# Altium PCB LED_Controller.PcbDoc
Units mm, origin at the board's own origin, x right, y up, seen from the top; angles counter-clockwise.
Board outline 60 x 100 mm, 2 copper layers (Top Layer, Bottom Layer); 26 components, 28 nets, 119 pads, 71 vias.
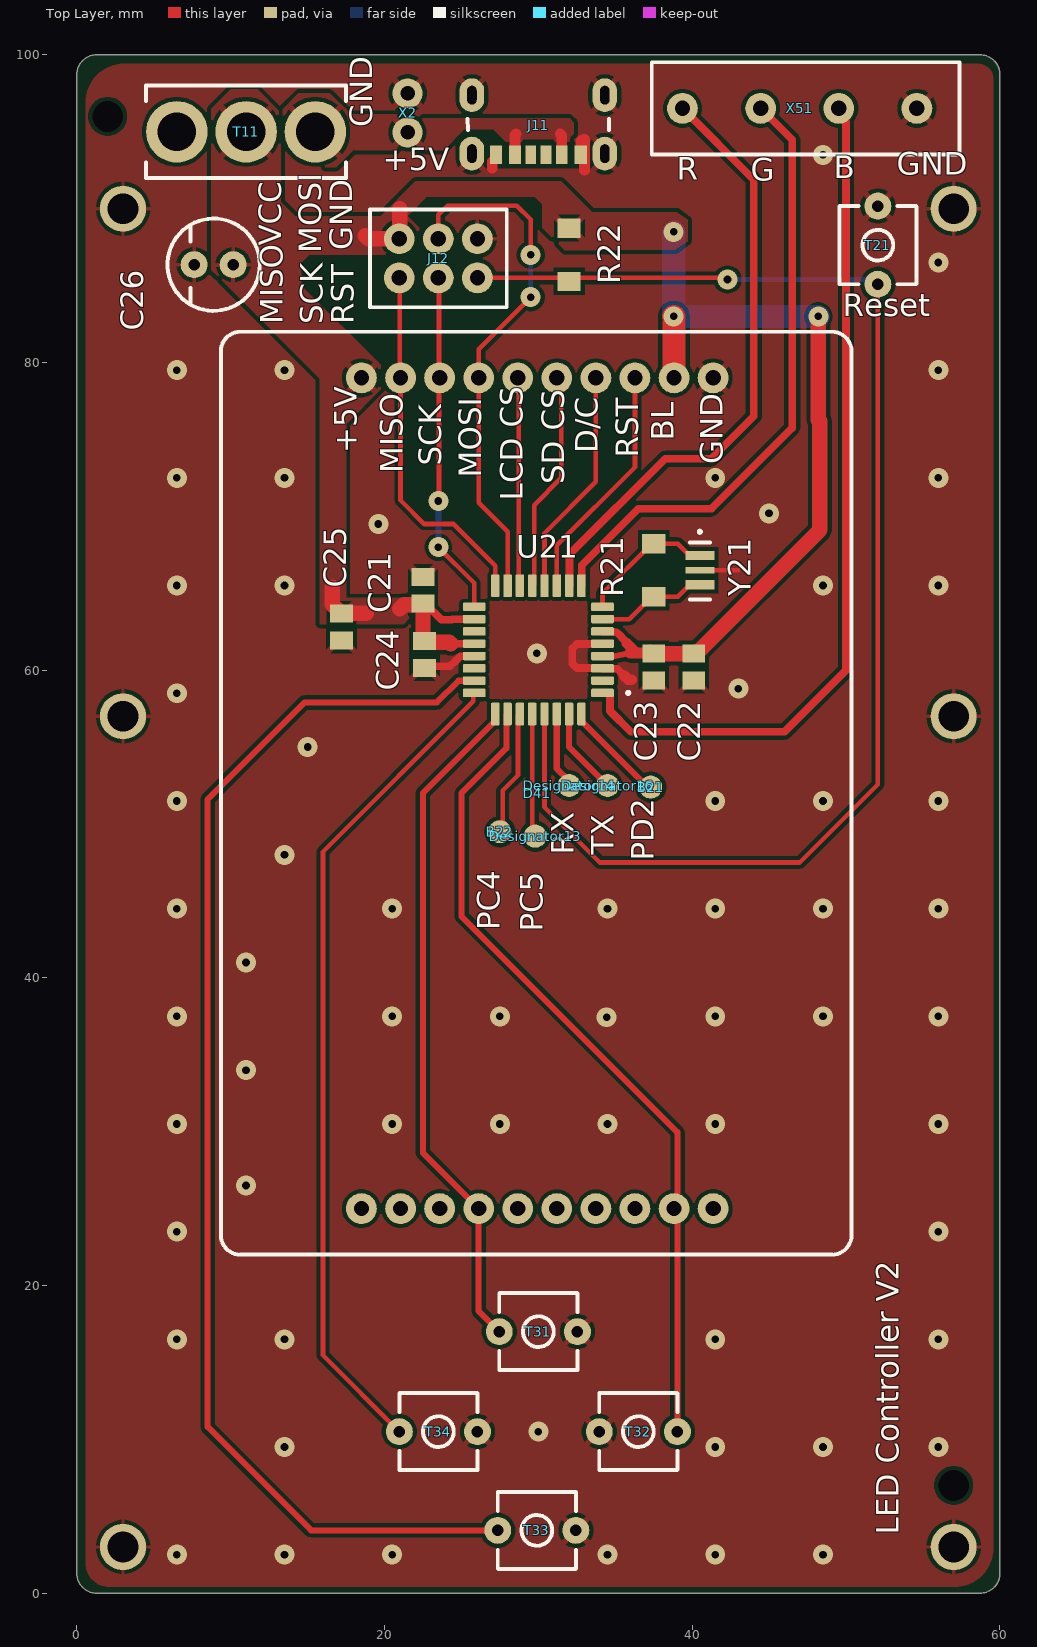
[diagram p0: Top Layer view]
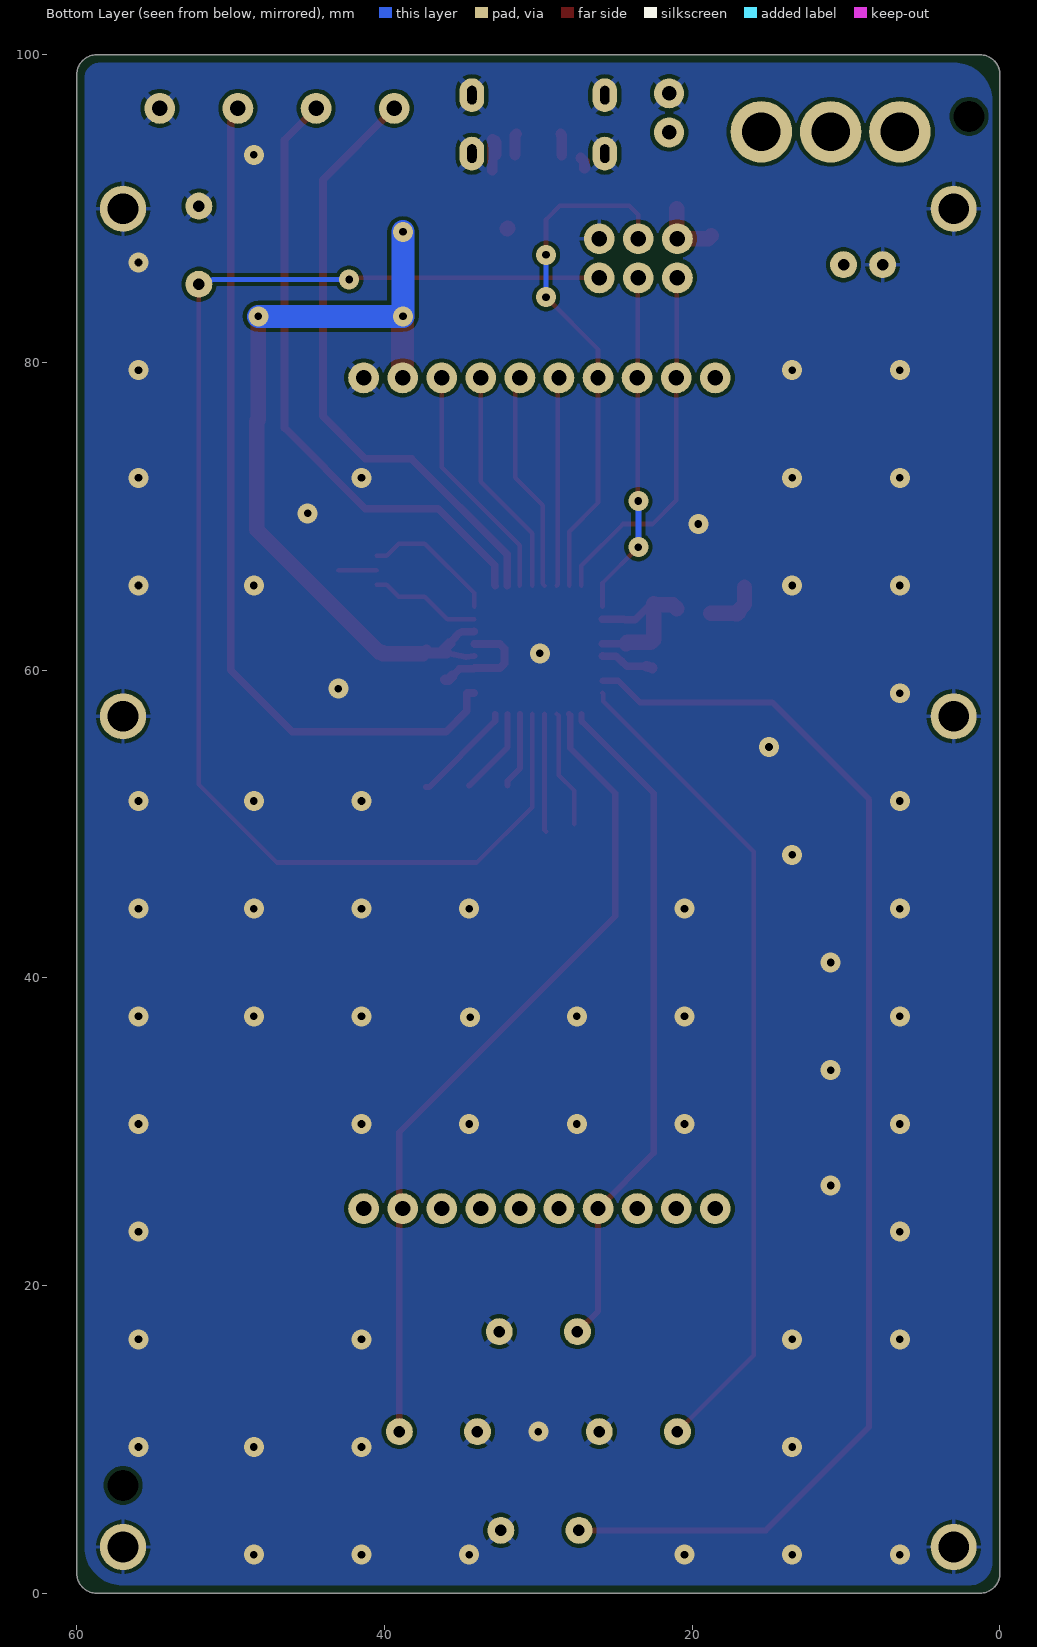
[diagram p1: Bottom Layer view, seen from below]

## Layer stack, top to bottom
Top Solder: solder mask 0.0102, Solder Resist, Dk 3.5
Top Layer: signal copper 0.0356
Dielectric 1: dielectric 0.32, FR-4, Dk 4.8
Bottom Layer: signal copper 0.0356
Bottom Solder: solder mask 0.0102, Solder Resist, Dk 3.5

## Board outline
0,1.27 ccw(c1.27,1.27) 1.27,0 58.73,0 ccw(c58.73,1.27) 60,1.27 60,98.73 ccw(c58.73,98.73) 58.73,100 1.27,100 ccw(c1.27,98.73) 0,98.73

## Design rules (kind name [scope] priority, off if disabled: settings)
Clearance [All] p1: gap=0.254 ignorepadtopadclearanceinfootprint=FALSE except(0: Arc-Hole Track-Hole SMDPad-Hole THPad-Hole Via-Hole Fill-Hole Poly-Hole Region-Hole Text-Hole; 0.127: SMDPad-SMDPad; 0.3: Arc-Via Track-Via Via-Via; 0.4: Arc-THPad Track-THPad; 0.5: THPad-THPad)
HoleSize [All] p1: absolutevalues=TRUE maxlimit=6.3 minlimit=0.3 maxpercent=80.000 minpercent=20.000
HoleToHoleClearance [All] p1: gap=0.5 allowstackedmicrovias=TRUE
MinimumAnnularRing [All] p1: minimumring=0.3
MinimumSolderMaskSliver [All] p1: minsoldermaskwidth=0.1
PlaneConnect [All] p1: planeconnectstyle=Direct reliefexpansion=0.508 reliefentries=4 reliefconductorwidth=0.254 reliefairgap=0.254
PolygonConnect [All] p1: thpad.connectstyle=Relief thpad.reliefconductorwidth=0.4 thpad.reliefentries=4 thpad.polygonreliefangle="45 Angle" thpad.airgapwidth=0.254 smdpad.connectstyle=Relief smdpad.reliefconductorwidth=0.4 smdpad.reliefentries=4 smdpad.polygonreliefangle="45 Angle" smdpad.airgapwidth=0.254 via.connectstyle=Direct via.reliefconductorwidth=0.254 via.reliefentries=4 via.polygonreliefangle="90 Angle" via.airgapwidth=0.254
RoutingVias [All] p1: holewidth=0.5 width=0.7 viastyle="Through Hole" minholewidth=0.3 minwidth=0.5 maxholewidth=1 maxwidth=2
SolderMaskExpansion [All] p1: expansion=0.102 istentingtop=FALSE
Width [All] p1: maxlimit=2 minlimit=0.127 preferedwidth=0.2 minimp=50.000000 maximp=50.000000 favimp=50.000000
26 further rules are at their usual default settings.

## Classes and differential pairs
component class LED_Controller: B21 B22 C21 C22 C23 C24 C25 C26 D41 J11 J12 R21 R22 T11 T21 T31 T32 T33 T34 U21 X2 X51 Y21

## Components (designator, comment, footprint, x,y, rotation, side; value= is the part's Value field where it differs from the comment)
B21 "BreakOutPad" BreakOutPad#1 37.3,52.4 r0 top
B22 "BreakOutPad" BreakOutPad#2 27.5,49.5 r90 top
C21 "100n" CAP0805 22.5,65.2 r270 top
C22 "100n" CAP0805 40.1,60.2 r90 top
C23 "100n" CAP0805 37.5,60.2 r90 top
C24 "100n" CAP0805 22.6,61.02 r90 top
C25 "1u" CAP0805 17.2,62.8 r90 top
C26 "100u" ELKO_D5.0 8.89,86.36 r180 top
D41 "Arduino LCD Display A000096" "Arduino LCD Display A000096" 50.36,22 r90 top locked
Designator13 "Comment" BreakOutPad#3 29.791,49.209 r0 top
Designator14 "Comment" BreakOutPad#3 32,52.5 r0 top
Designator16 "Comment" BreakOutPad#4 34.5,52.5 r0 top
J11 "USB Type C Conector" MOLEX_2171750001 30,99.98 r180 top
J12 "2x3 Pin Header" "2x3 Pin Header" 20.96,85.5 r90 top
R21 "1M" RES_ERJU08J154V 37.5,66.5 r270 top
R22 "10k" RES_ERJU08J154V 32,87 r90 top
T11 "Toggel Switch" "Toggel Switch" 11,95 r180 top
T21 "Taster" Taster 52.07,87.63 r270 top
T31 "Taster" Taster 30,17 r180 top
T32 "Taster" Taster 36.5,10.5 r0 top
T33 "Taster" Taster 29.9,4.08 r180 top
T34 "Taster" Taster 23.5,10.5 r180 top
U21 "ATMEGA328P-AU" QFP80P900X900X120-32N 30,61.32 r180 top
X2 "PinHedader" CON2 21.5,94.96 r90 top
X51 "PinHedader" CON4_200mil 39.37,96.52 r0 top
Y21 "CSTCE16M0V53-R0" OSC_CSTCE16M0V53-R0 40.5,66.5 r270 top value=16MHz

## Footprints (in the part's own frame and the unit in brackets; to place one, negate y for a bottom-side part, rotate by r counter-clockwise, add the part's x,y. Pads: shape width x height; smd on the part's side, far side on the other; paste and mask are expansions set on the pad)
"2x3 Pin Header" [mm]
  round 2 hole 1: 1(0,0) 2(2.54,0) 3(0,-2.54) 4(2.54,-2.54) 5(0,-5.08) 6(2.54,-5.08)
  silkscreen extent -1.91,-6.98 4.45,1.91
"Arduino LCD Display A000096" [mm]
  round 2 hole 1: 1(3,31.86) 2(3,29.32) 3(3,26.78) 4(3,24.24) 5(3,21.7) 6(3,19.16) 7(3,16.62) 8(3,14.08) 9(3,11.54) 10(3,9) +5V(57,31.86) BL(57,11.54) D/C(57,16.62) GND(57,9) "LCD CS"(57,21.7) MISO(57,29.32) MOSI(57,24.24) Reset(57,14.08) SCK(57,26.78) "SD CS"(57,19.16)
  silkscreen extent 0,0 60,41
BreakOutPad#1 [mm]
  round 1.5 smd: PD2(0,0)
BreakOutPad#2 [mm]
  round 1.5 smd: PC4(0,0)
BreakOutPad#3 [mm]
  round 1.5 smd: 1(0,0)
BreakOutPad#4 [mm]
  round 1.5 smd: TX(0,0)
CAP0805 [mm]
  rect 1.17x1.47 smd: 1(-0.871,0) 2(0.871,0)
CON2 [mm]
  round 1.95 hole 0.95: 1(0,0) 2(2.54,0)
CON4_200mil [mm]
  round 2 hole 1: 1(0,0) 2(5.08,0) 3(10.16,0) 4(15.24,0)
  silkscreen extent -2,-3 18,3
ELKO_D5.0 [mm]
  round 1.75 hole 0.75: N(1.27,0) P(-1.27,0)
  silkscreen extent -3,-3 3,3
MOLEX_2171750001 [mm]
  rect 0.7x1.2 smd mask+0.064: A5(-0.5,6.48) B5(0.5,6.48)
  rect 0.76x1.2 smd mask+0.064: A9(1.52,6.48) B9(-1.52,6.48)
  rect 0.8x1.2 smd mask+0.064: A12(2.75,6.48) B12(-2.75,6.48)
  oval 1.6x2.2 hole 0.6 slot 1.2 at 90 deg mask+0.064: SH1(-4.32,2.6) SH2(4.32,2.6) SH3(-4.32,6.4) SH4(4.32,6.4)
  silkscreen extent -4.6,4.13 4.6,4.85
OSC_CSTCE16M0V53-R0 [mm]
  rect 0.6x1.9 smd: 1(-0.95,0) 3(0.95,0)
  rect 0.4x1.9 smd: 2(0,0)
  silkscreen extent -2.6,-0.65 1.9,0.65, body extent -1.6,-0.65 1.6,0.65, height 1
QFP80P900X900X120-32N [mm]
  rrect25% 1.47x0.55 smd mask+0.102: 1(-4.17,2.8) 2(-4.17,2) 3(-4.17,1.2) 4(-4.17,0.4) 5(-4.17,-0.4) 6(-4.17,-1.2) 7(-4.17,-2) 8(-4.17,-2.8) 17(4.17,-2.8) 18(4.17,-2) 19(4.17,-1.2) 20(4.17,-0.4) 21(4.17,0.4) 22(4.17,1.2) 23(4.17,2) 24(4.17,2.8)
  rrect25% 0.55x1.47 smd mask+0.102: 9(-2.8,-4.17) 10(-2,-4.17) 11(-1.2,-4.17) 12(-0.4,-4.17) 13(0.4,-4.17) 14(1.2,-4.17) 15(2,-4.17) 16(2.8,-4.17) 25(2.8,4.17) 26(2,4.17) 27(1.2,4.17) 28(0.4,4.17) 29(-0.4,4.17) 30(-1.2,4.17) 31(-2,4.17) 32(-2.8,4.17)
  silkscreen extent -5.94,2.7 -5.74,2.9, body extent -4.5,-4.5 4.5,4.5, height 1.2
RES_ERJU08J154V [mm]
  rect 1.25x1.5 smd: 1(-1.725,0) 2(1.725,0)
Taster [mm]
  round 1.75 hole 0.75: 1(-2.54,0) 2(2.54,0)
  silkscreen extent -2.54,-2.5 2.54,2.5
"Toggel Switch" [mm]
  round 4 hole 2.5: 1(-4.5,0) 2(0,0) 3(4.5,0)
  silkscreen extent -6.5,-3 6.5,3

## Part data
C21 C22 C23 C24 C25: library part "SMD CAP", Package=None, Availability=Unavailable, MP=VJ1206A220GXCAP, Price=None
C26: library part ELKO
J11: "USB-C (USB TYPE-C) USB 2.0 Receptacle Connector 24 (6+18 Dummy) Position Surface Mount, Right Angle; Through Hole", Package=None, Check_prices=https://www.snapeda.com/parts/2171750001/Molex/view-part/?ref=eda, MF=Molex, MP=2171750001, SnapEDA_Link=https://www.snapeda.com/parts/2171750001/Molex/view-part/?ref=snap
R21 R22: library part "Res 1206", Package=None, Availability=Unavailable, MP=ERJU08J154V, Price=None
U21: "AVR AVRÂ® ATmega Microcontroller IC 8-Bit 20MHz 32KB (16K x 16) FLASH 32-TQFP (7x7)", Package="TQFP-32 Microchip", Check_prices=https://www.snapeda.com/parts/ATMEGA328P-AU/Microchip/view-part/?ref=eda, MF="Microchip Technology", MP=ATMEGA328P-AU, SnapEDA_Link=https://www.snapeda.com/parts/ATMEGA328P-AU/Microchip/view-part/?ref=snap
X2: library part "CON 2"
X51: library part CON4
Y21: "16 MHz Ceramic Resonator Built in Capacitor 15 pF Â±0.3% -20Â°C ~ 80Â°C Surface Mount", Package="SMD-3 Murata", Availability="In Stock", Check_prices=https://www.snapeda.com/parts/CSTCE16M0V53-R0/Murata+Electronics+North+America/view-part/?ref=eda, MF=Murata, MP=CSTCE16M0V53-R0, Price=None, Purchase-URL=https://pricing.snapeda.com/search/part/CSTCE16M0V53-R0/?ref=eda, SnapEDA_Link=https://www.snapeda.com/parts/CSTCE16M0V53-R0/Murata+Electronics+North+America/view-part/?ref=snap

## Free pads (board coordinates)
  round 3 hole 2: 13(3,3) 13(3,57) 13(3,90) 13(57,3) 13(57,57) 13(57,90)
  round 1.152 hole 2 unplated: TH(2,96) TH(57,7)

## Via types
v1: diameter 1.3, hole 0.5, Top Layer to Bottom Layer, tented both sides, 71 vias

## Nets (pads, with @x,y where several pads share a name; then routed paths per layer and width w, separated by ;. In a path a pad name is that pad's centre, name@x,y a point inside that pad or via, vN(x,y) a via of type N, cw(c..) or ccw(c..) an arc to the next point about the centre after c; other vN are vias at no path point)
ADC6: U21.19
ADC7: U21.22
button_down: T33.2 U21.23 | length 83
  Top Layer w0.4: U21.23 25.826,59.316 24.816,59.316 23.4,57.9 14.8,57.9 8.5,51.6 8.5,10.8 15.22,4.08 T33.2
button_left: T34.2 U21.24 | length 54.1
  Top Layer w0.3: T34.2 16,15.46 16,48.2 25.771,57.971 25.771,58.461 U21.24
button_right: D41.9 T32.2 U21.26 | length 53.7
  Top Layer w0.4: U21.26 27.929,57.079 27.929,54.929 25,52 25,44 39.04,29.96 39.04,25 T32.2
button_up: D41.4 T31.2 U21.25 | length 44.2
  Top Layer w0.4: U21.25 27.2,56.69 27.125,56.615 27.115,56.615 22.5,52 22.5,28.62 D41.4 26.12,18.34 T31.2
D/C: D41.D/C U21.12 | length 14.9
  Top Layer w0.3: U21.12 30.4,68.9 33.74,72.24 D41.D/C
GND: C21.1 C22.1 C23.1 C24.1 C25.1 C26.N D41.GND J11.A12 J11.B12 J11.SH1 J11.SH2 J11.SH3 J11.SH4 J12.6 pad.13 T21.1 T31.1 T32.1 T33.1 T34.1 U21.3 U21.5 U21.21 X2.2 X51.4 Y21.2 | length 17.7
  Top Layer w0.3: Y21.2 43,66.5
  Top Layer w0.5: C24.1 23.085,60.25 24.25,60.25 24.591,60.591 24.591,60.563 24.927,60.899 25.345,60.899 U21.21 ; U21.5 34.149,61.699 32.493,61.699 32.2,61.406 32.2,60.434 32.493,60.141 34.149,60.141 U21.3 34.191,60.099 35.121,60.099 35.6,59.62
  Top Layer w0.7: C24.1 C24.1@22.985,60.249 ; 27,92.625 27,93.05 J11.A12@27.25,93.3 ; J11.B12 32.75,94.25 cw(c33,94.25) 33,94.5 33,92.5 ; 35.6,59.62 35.846,59.374 36.052,59.374
  other v1: 6.5,2.5 13.5,2.5 20.5,2.5 34.5,2.5 41.5,2.5 48.5,2.5 13.5,9.5 41.5,9.5 48.5,9.5 56,9.5 30,10.5 6.5,16.5 13.5,16.5 41.5,16.5 56,16.5 6.5,23.5 56,23.5 11,26.5 6.5,30.5 20.5,30.5 27.5,30.5 34.5,30.5 41.5,30.5 56,30.5 11,34 34.437,37.437 6.5,37.5 20.5,37.5 27.5,37.5 41.5,37.5 48.5,37.5 56,37.5 11,41 6.5,44.5 20.5,44.5 34.5,44.5 41.5,44.5 48.5,44.5 56,44.5 13.5,48 6.5,51.5 41.5,51.5 48.5,51.5 56,51.5 15,55 6.5,58.5 43,58.8 29.9,61.1 6.5,65.5 13.5,65.5 48.5,65.5 56,65.5 19.6,69.5 45,70.2 6.5,72.5 13.5,72.5 41.5,72.5 56,72.5 6.5,79.5 13.5,79.5 56,79.5 56,86.5 48.5,93.5
"LCD CS": "D41.LCD CS" U21.14 | length 13.6
  Top Layer w0.3: 28.66,79 28.73,78.93 28.73,65.56 U21.14
MISO: D41.MISO J12.1 U21.16 | length 23.7
  Top Layer w0.3: J12.1 21,85.46 21,79.04 D41.MISO 21.04,71.04 22.58,69.5 24.5,69.5 27.2,66.8 U21.16
MOSI: D41.MOSI J12.4 U21.15 | length 34.2
  Top Layer w0.3: J12.4 23.5,89.6 24.1,90.2 28.6,90.2 29.5,89.3 v1(29.5,87) ; U21.15 28,69 26.12,70.88 26.12,80.87 v1(29.5,84.25)
  Bottom Layer w0.3: v1(29.5,84.25) v1(29.5,87)
OUTPUT_BLUE: U21.1 X51.3 | length 55.9
  Top Layer w0.5: U21.1 34.63,58.52 34.655,58.495 34.655,57.345 36,56 46,56 50,60 50,95.644 49.53,96.114 X51.3
OUTPUT_GREEN: U21.9 X51.2 | length 40.3
  Top Layer w0.5: U21.9 32.825,65.515 32.825,66.825 36.5,70.5 41.25,70.5 46.5,75.75 46.5,94.47 X51.2
OUTPUT_RED: U21.10 X51.1 | length 39.6
  Top Layer w0.5: U21.10@32.021,65.511 32.021,67.521 38.25,73.75 41.25,73.75 44,76.5 44,91.89 X51.1
PC4: B22.PC4 U21.27 | length 7.6
  Top Layer w0.3: B22.PC4@27.675,50 27.675,52.175 28.679,53.179 28.679,57.029 U21.27
PC5: Designator13.1 U21.28 | length 7.7
  Top Layer w0.3: Designator13.1@29.5,49.5 29.6,49.6 U21.28
PD2: B21.PD2 U21.32 | length 6.7
  Top Layer w0.4: U21.32 32.8,56.69 32.875,56.615 32.885,56.615 37.1,52.4 B21.PD2
PD4: U21.2
RST: J12.5 R22.1 T21.2 U21.29 | length 90
  Top Layer w0.3: J12.5 32,85.5 42.2,85.5 v1(42.3,85.4) ; U21.29 30.4,51.1 34,47.5 47,47.5 52.07,52.57 T21.2
  Bottom Layer w0.3: v1(42.3,85.4) 51.169,85.4 51.202,85.367 51.793,85.367 T21.2
RST_LCD: D41.Reset U21.11 | length 15.6
  Top Layer w0.3: U21.11 31.2,68.125 36.28,73.205 D41.Reset
RX: Designator14.1 U21.30 | length 5
  Top Layer w0.4: U21.30 31.2,53.598 32,52.798 Designator14.1
SCK: D41.SCK J12.3 U21.17 | length 22.4
  Top Layer w0.3: v1(23.5,68) 25.83,65.67 U21.17 ; v1(23.5,71) 23.54,71.04 23.54,78.96 D41.SCK 23.54,79.04 23.54,85.46 J12.3
  Bottom Layer w0.4: v1(23.5,68) v1(23.5,71)
"SD CS": "D41.SD CS" U21.13 | length 14.4
  Top Layer w0.3: U21.13 29.721,65.611 29.721,70.721 31.5,72.5 31.5,78.7 31.2,79
TX: Designator16.TX U21.31 | length 5.7
  Top Layer w0.4: U21.31 32,55 Designator16.TX
VBUS: J11.A9 J11.B9 T11.1 X2.1 | length 2.8
  Top Layer w0.7: J11.A9 28.48,94.78 28.55,94.85 ; 31.425,94.85 31.52,94.755 J11.B9 J11.B9@31.525,93.495
VCC: C21.2 C22.2 C23.2 C24.2 C25.2 C26.P D41.+5V D41.BL J12.2 R22.2 T11.2 U21.4 U21.6 U21.18 U21.20 | length 72.2
  Top Layer w0.4: U21.4 34.705,60.86 35.949,61.111
  Top Layer w0.5: C21.2 22.65,64.329 23.704,63.275 24.375,63.275 24.42,63.32 U21.18 ; 24.305,61.72 U21.20 ; U21.6 34.655,62.499 34.836,62.499 cw(c34.836,61.926) 35.27,62.301 35.75,61.75
  Top Layer w0.7: 35.75,61.75 36.169,61.331 ; 35.949,61.111 37.115,61.111 37.265,61.261 37.265,61.306 C23.2
  Top Layer w1: 16.6,65.4 16.6,64.271 16.965,63.906 16.965,63.756 17.05,63.671 C25.2 17.229,63.7 18.8,63.7 ; 18.75,88.25 18.96,88.04 J12.2 21,88.08 21,90 ; 21,64 21.244,64.244 22.415,64.244 C21.2 22.5,61.976 22.585,61.891 C24.2 22.685,61.806 24.219,61.806 24.305,61.72 ; R22.2 R22.2@32.025,88.7 ; C23.2 C22.2 40.185,61.156 40.335,61.156 48.3,69.121 48.3,76.19 48.2,76.29 v1(48.2,83)
  Top Layer w1.5: v1(38.8,83) 38.82,82.98 D41.BL
  Bottom Layer w1.5: v1(38.8,83) v1(38.8,88.5) ; v1@38.81,83.01 38.82,83 v1(48.2,83)
XTAL1: R21.2 U21.7 Y21.3 | length 7.3
  Top Layer w0.3: U21.7 35.92,63.32 37.375,64.775 R21.2 39.075,64.775 39.85,65.55 Y21.3
XTAL2: R21.1 U21.8 Y21.1 | length 8.9
  Top Layer w0.3: U21.8 34.17,65.02 37.375,68.225 R21.1 39.075,68.225 39.85,67.45 Y21.1
pads on no net: D41.1 D41.2 D41.3 D41.5 D41.6 D41.7 D41.8 D41.10 J11.A5 J11.B5 T11.3

## Polygon pours and split planes (outlines as drawn)
GND on Top Layer "GND_L01_P011" (solid, remove dead copper, pour order 11): 0.579,96.921 cw(c3.079,96.921) 3.079,99.421 58.579,99.421 cw(c58.579,98.421) 59.579,98.421 59.579,2.921 cw(c57.079,2.921) 57.079,0.421 2.079,0.421 cw(c2.079,1.921) 0.579,1.921
VCC on Top Layer "VCC_L01_P003" (solid, pour order 3): 19.5,89.275 22,91.775 31.5,91.775 33.5,89.775 39,89.775 39.7,89.275 39.7,87.9 38.9,87.325 31.75,87.275 30.25,88.775 30.25,90.275 29.75,90.775 22.75,90.775 21.25,89.275
VBUS on Top Layer "VBUS_L01_P000" (solid, pour order 0): 28.48,93.5 29,94.5 31,94.5 31.175,94.05 31.175,93.725 31.875,93.7 32.075,94.65 32.3,94.875 32.3,95.6 32.025,95.875 22.205,95.875 21.955,96.125 17.825,96.125 16.45,97.5 14.4,97.5 13.375,96.475 13.375,93.75 14.425,92.7 16.875,92.7 18.025,93.85 18.06,93.815 23.84,93.815 25.175,95.15 27.075,95.15 28.175,94.05
VCC on Top Layer "VCC_L01_P002" (solid, remove dead copper, pour order 2): 21.25,63 22,63.75 22,64.7 17.5,64.7 17.5,76 19.75,78.25 19.75,79.85 14.6,85 14.6,86.5 15.1,87 21.75,87 22.25,87.5 22.25,88.75 21.5,89.5 14.2,89.5 13.25,90.45 13.25,96.25 11.75,97.75 10,97.75 8.75,96.5 8.75,86 15.8,78.95 15.8,63
GND on Bottom Layer "GND_L02_P009" (solid, remove dead copper, pour order 9): 0.5,97 cw(c3,97) 3,99.5 58.5,99.5 cw(c58.5,98.5) 59.5,98.5 59.5,3 cw(c57,3) 57,0.5 2,0.5 cw(c2,2) 0.5,2

## Silkscreen, mask and mechanical layers (free items; w line width, h text height)
Top Overlay:
  text "GND" at 19.675,95.3 h2.5 r90
  text "+5V" at 19.9,92.012 h2.5
  text "GND" at 53.3,91.725 h2.5
  text "B" at 49.2,91.5 h2.5
  text "R" at 39,91.4 h2.5
  text "G" at 43.8,91.325 h2.5
  text "VCC" at 13.775,87.6 h2.5 r90
  text "GND" at 18.375,87.3 h2.5 r90
  text "MOSI" at 16.375,87.1 h2.5 r90
  text "Reset" at 49.8,82.525 h2.5
  text "MISO" at 13.875,82.5 h2.5 r90
  text "SCK" at 16.475,82.5 h2.5 r90
  text "RST" at 18.475,82.5 h2.5 r90
  text "BL" at 39.3,74.9 h2.5 r90
  text "+5V" at 18.688,74.1 h2.5 r90
  text "D/C" at 34.35,74.1 h2.5 r90
  text "RST" at 36.975,73.8 h2.5 r90
  text "GND" at 42.475,73.4 h2.5 r90
  text "SCK" at 24.175,73.3 h2.5 r90
  text "MISO" at 21.675,72.8 h2.5 r90
  text "MOSI" at 26.775,72.5 h2.5 r90
  text "SD CS" at 32.175,72.1 h2.5 r90
  text "LCD CS" at 29.475,71 h2.5 r90
  text "RX" at 32.8,48 h2.5 r90
  text "TX" at 35.4,48 h2.5 r90
  text "PD2" at 38,47.6 h2.5 r90
  text "PC4" at 27.972,43.1 h2.5 r90
  text "PC5" at 30.772,43 h2.5 r90
  text "LED Controller V2" at 53.925,3.8 h2.5 r90
Outline:
  lines w0.254: 0,1.27 ccw(c1.27,1.27) 1.27,0 10,0 58.73,0 ccw(c58.73,1.27) 60,1.27 60,98.73 ccw(c58.73,98.73) 58.73,100 1.27,100 ccw(c1.27,98.73) 0,98.73 0,1.27
Dimensions:
  lines w0.254: 0,-7.254 0,-6.746 ; 1.524,-7.508 0,-7 ; 1.524,-6.492 0,-7 ; 24.896,-7 0,-7 ; 35.104,-7 60,-7 ; 58.476,-7.508 60,-7 ; 58.476,-6.492 60,-7 ; 60,-7.254 60,-6.746 ; 66.492,1.524 67,0 ; 66.492,98.476 67,100 ; 66.746,0 67.254,0 ; 66.746,100 67.254,100 ; 67,44.261 67,0 ; 67,55.739 67,100 ; 67.508,1.524 67,0 ; 67.508,98.476 67,100
  text "100 (mm)" at 67.914,44.515 h1.52 r90
  text "60 (mm)" at 25.15,-7.914 h1.52